# EAGLE board shield_SIM800L (EAGLE 7.5.0)
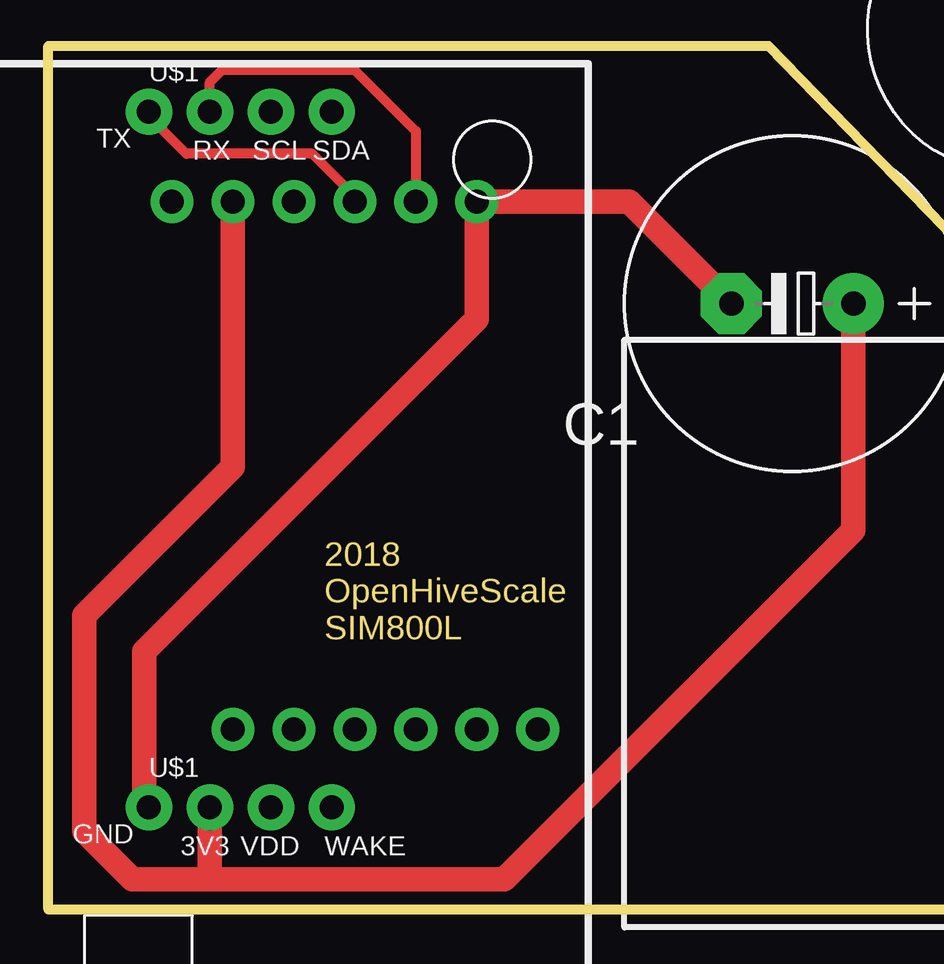
[diagram p0: board, top side]
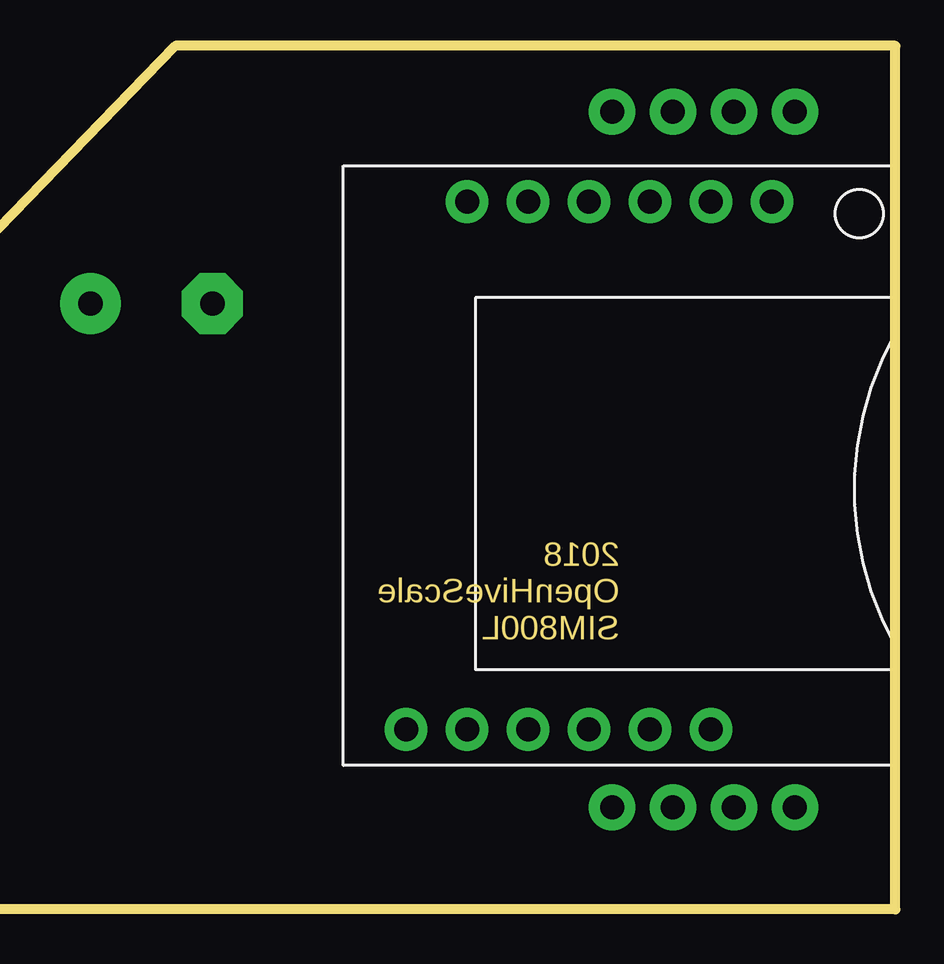
[diagram p1: board, bottom side, seen from below]

No outline drawn. Coordinates in mm, seen from the top.
Copper layers (1*16): Top 0.035mm / dielectric 1.5mm / Bottom 0.035mm
Design rules "SeeedStudio_2layer_DRU_no_angle_20140221": minimum track width 6mil, minimum drill 12mil, track to track 6mil, track to pad 6mil, pad to pad 6mil, via to via 6mil, smd to smd 0mil, copper to edge 10mil, drill to drill 10mil, minimum pad ring 10mil, minimum via ring 6mil, stop-mask expansion 2mil, vias tented up to drill 100mil, thermal gap 10mil
Net classes: 0 default: clearance 0.205 mm
Milling: 5 lines

## Footprints (pad centres in the part's own frame; a part is rotated, then mirrored left to right if it is on the bottom)
E5-13 = drill 1.016 pad 2.54: + -2.54,0 | drill 1.016 pad 2.54 octagon: - 2.54,0
SHIELD = drill 1 pad 1.93: +3V3 36.73,23; GND 34.19,23; RX 36.73,52; SCL 39.27,52; SDA 41.81,52; TX 34.19,52; VDD 39.27,23; WAKE 41.81,23
SIM800L = drill 1 pad 1.778: DTR 11,1.27; GND -11,-6.35; MICN 11,-3.81; MICP 11,-1.27; NET -11,6.35; RING 11,3.81; RST -11,1.27; RXD -11,-1.27; SPKN 11,-8.89; SPKP 11,-6.35; TXD -11,-3.81; VCC -11,3.81

## Placement (x,y rotation side)
C1  [E5-13]  31,25.25 180 top
U$1  SHIELD  [SHIELD]  -30,-18.75 0 top
U$6  SIM800L  [SIM800L]  11.5,18.5 270 bottom

## Library data of the parts
C1 = rcl
U$1 U$6 = balance

## Nets
N$1: U$1.RX U$6.TXD
N$2: U$1.TX U$6.RXD
N$3: C1.- U$1.GND U$6.GND
N$4: C1.+ U$1.+3V3 U$6.VCC
VDD: U$1.VDD

## Tracks (layer width: path | path; a pad name or v marks a point on that pad's centre or on a via)
N$1
  Top 0.406: U$1.RX 6.73,34.48 7.25,35 12.75,35 15.31,32.44 U$6.TXD
N$2
  Top 0.406: U$1.TX 4.19,33.06 5.75,31.5 11,31.5 12.77,29.73 U$6.RXD
N$3
  Top 1.016: C1.- 24.21,29.5 U$6.GND 17.85,24.6 4,10.75 4,4.44 U$1.GND
N$4
  Top 1.016: C1.+ 33.54,15.79 19,1.25 7,1.25 | U$1.+3V3 6.73,1.52 7,1.25 | U$6.VCC 7.69,18.44 1.5,12.25 1.5,3.25 3.5,1.25 7,1.25

## Text on the board
Milling: 2018 / OpenHiveScale / SIM800L